# EAGLE board controlador_temperatura (EAGLE 9.6.2)
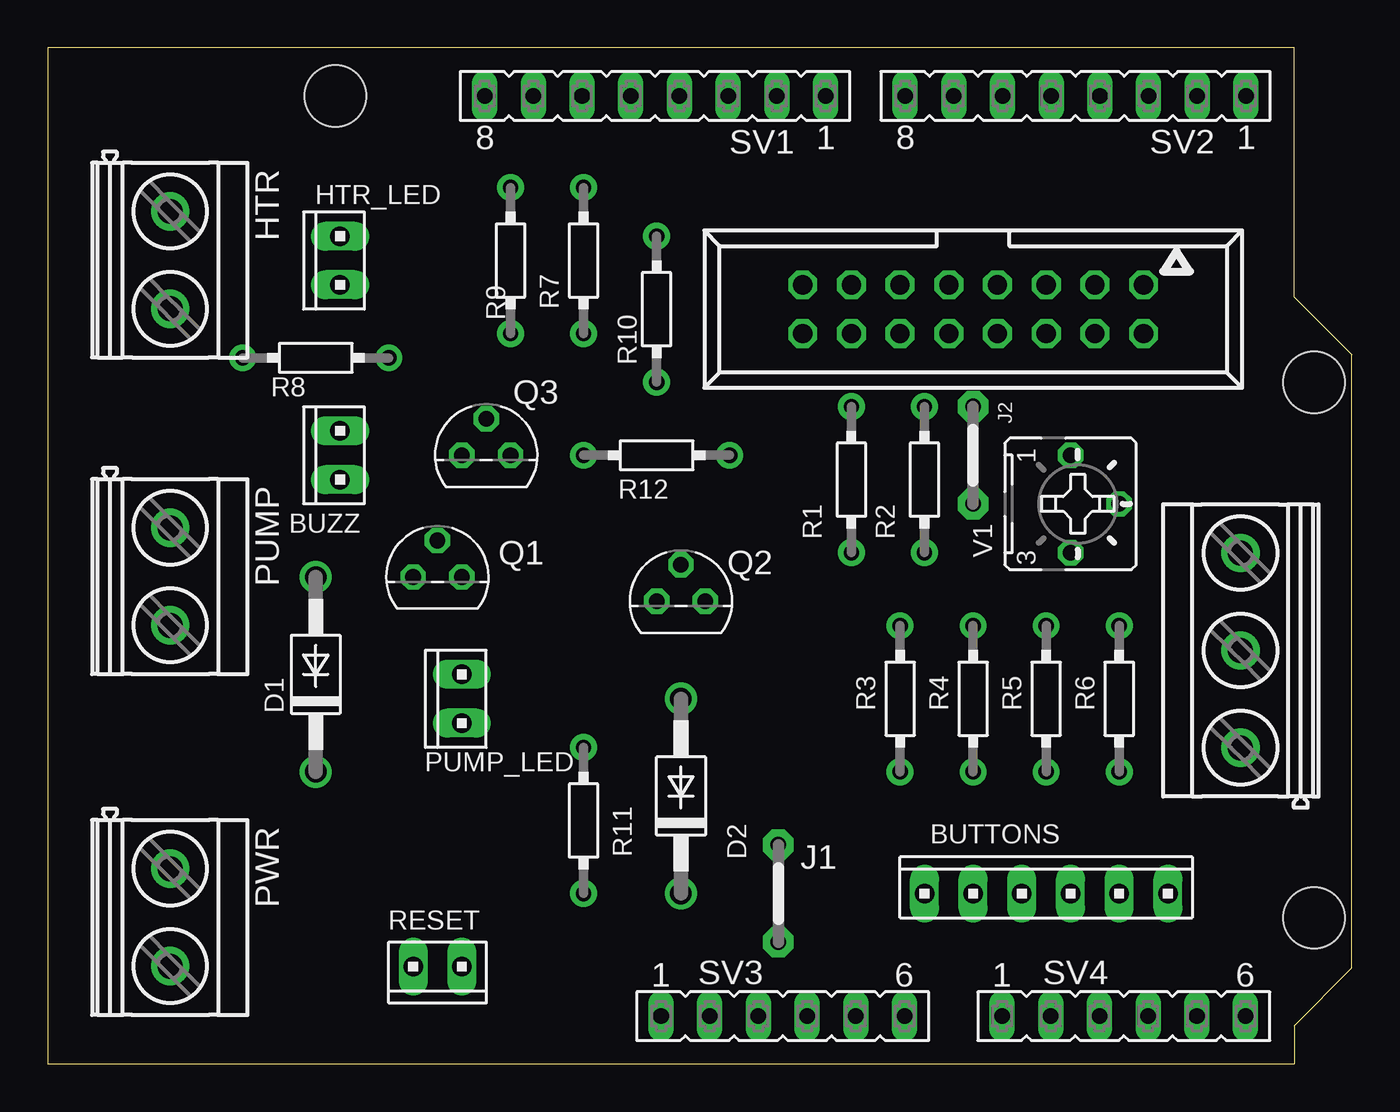
[diagram p0: board, top side]
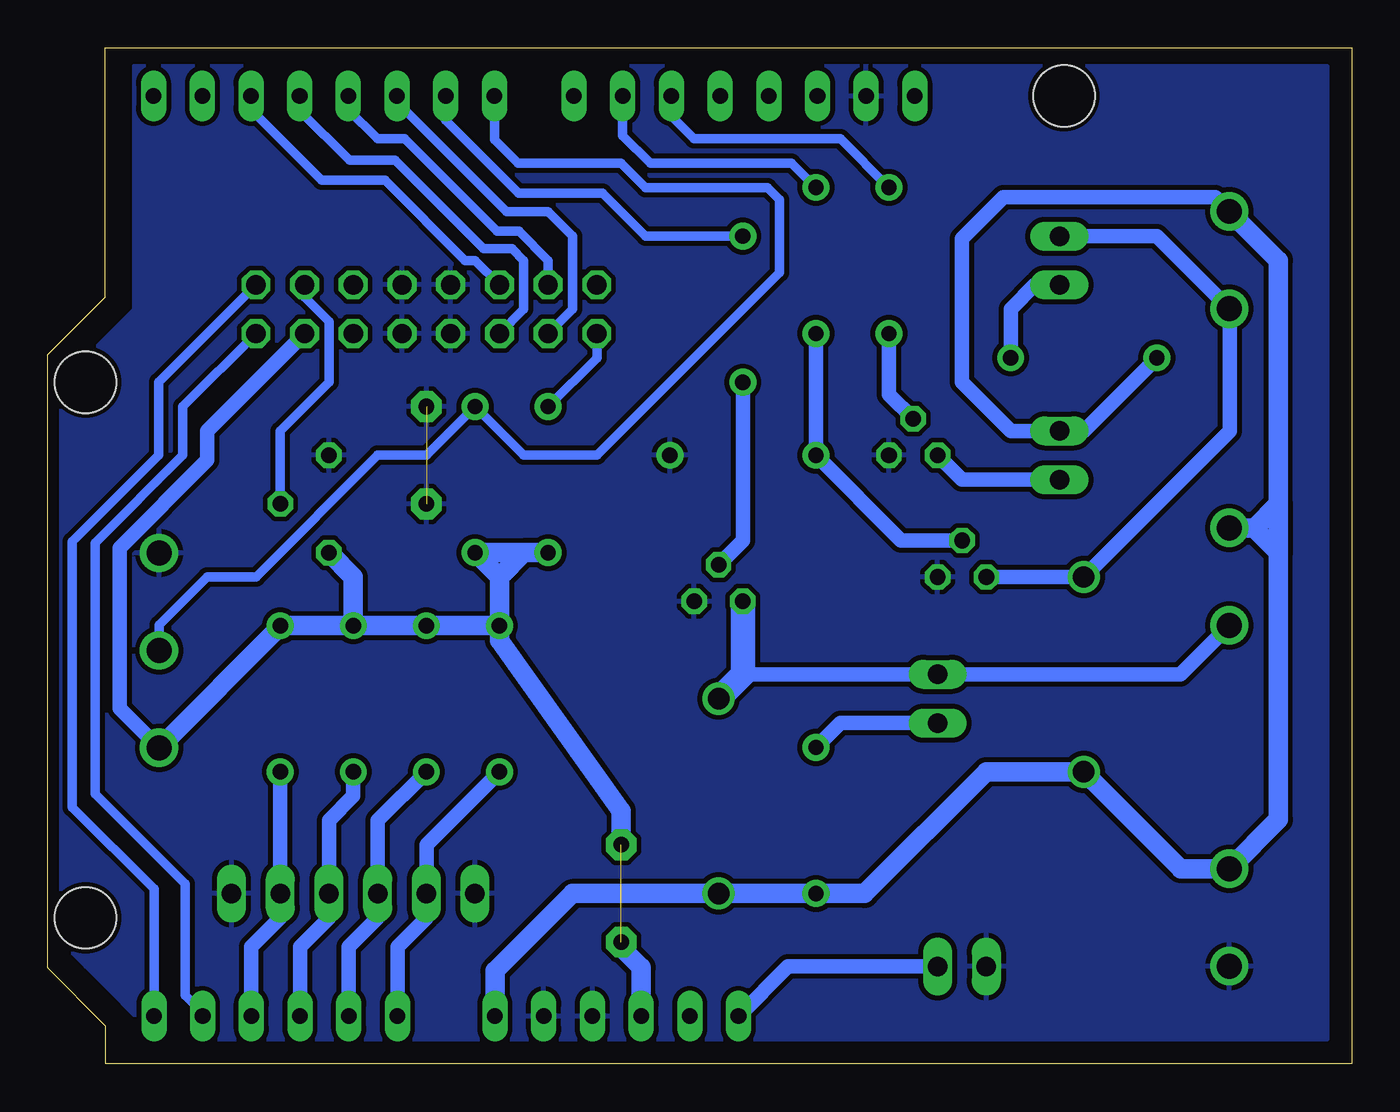
[diagram p1: board, bottom side, seen from below]

Size 68 x 53 mm. Coordinates in mm from the lower left corner, seen from the top.
Outline: 0,0 65,0 65,2 68,5 68,37 65,40 65,53 0,53 0,0
Copper layers (1*16): Top 0.035mm / dielectric 1.5mm / Bottom 0.035mm
Design rules "default *": minimum track width 6mil, minimum drill 0.35mm, track to track 10mil, track to pad 10mil, pad to pad 6mil, via to via 6mil, smd to smd 6mil, copper to edge 10mil, drill to drill 6mil, minimum pad ring 10mil, minimum via ring 8mil, stop-mask expansion 4mil, vias tented up to drill 0mil, thermal gap 10mil
Holes 3.2 mm at 15,50.5 66.04,35.56 66.04,7.62

## Footprints (pad centres in the part's own frame; a part is rotated, then mirrored left to right if it is on the bottom)
057-016-1 = drill 1 octagon: 1 -8.89,-1.27; 2 -8.89,1.27; 3 -6.35,-1.27; 4 -6.35,1.27; 5 -3.81,-1.27; 6 -3.81,1.27; 7 -1.27,-1.27; 8 -1.27,1.27; 9 1.27,-1.27; 10 1.27,1.27; 11 3.81,-1.27; 12 3.81,1.27; 13 6.35,-1.27; 14 6.35,1.27; 15 8.89,-1.27; 16 8.89,1.27
10X06MTA = drill 1.016 long: 1 6.35,0; 2 3.81,0; 3 1.27,0; 4 -1.27,0; 5 -3.81,0; 6 -6.35,0
10X02MTA = drill 1.016 long: 1 1.27,0; 2 -1.27,0
DO41-10 = drill 1.118: A 5.08,0; C -5.08,0
MKDSN1,5/3-5,08 = drill 1.3 pad 2: 1 -7.641,0.025; 2 -2.561,0.025; 3 2.519,0.025
MKDSN1,5/2-5,08 = drill 1.3 pad 2: 1 -2.561,0.025; 2 2.519,0.025
05 = drill 0.813 pad 1.6 octagon: 1 -2.54,0; 2 2.54,0
LCD-20X4-4HOLES = drill 1.016 square: P$1 10,57.5 | drill 1.016: P$2 12.54,57.5; P$3 15.08,57.5; P$4 17.62,57.5; P$5 20.16,57.5; P$6 22.7,57.5; P$7 25.24,57.5; P$8 27.78,57.5; P$9 30.32,57.5; P$10 32.86,57.5; P$11 35.4,57.5; P$12 37.94,57.5; P$13 40.48,57.5; P$14 43.02,57.5; P$15 45.56,57.5; P$16 48.1,57.5 | hole 3.2: 2.5,2.5; 2.5,57.5; 95.5,57.5; 95.5,2.5
TO92 = drill 0.813 octagon: 1 1.27,0; 2 0,1.905; 3 -1.27,0
RS1/8 = drill 0.8 pad 1.4: 1 -3.81,0; 2 3.81,0
FE08 = drill 0.813 long: 1 -8.89,0; 2 -6.35,0; 3 -3.81,0; 4 -1.27,0; 5 1.27,0; 6 3.81,0; 7 6.35,0; 8 8.89,0
FE06 = drill 0.813 long: 1 -6.35,0; 2 -3.81,0; 3 -1.27,0; 4 1.27,0; 5 3.81,0; 6 6.35,0
B25P = drill 0.813 octagon: A -2.54,0; E 2.54,0; S 0,2.54

## Placement (x,y rotation side)
A  LCD_A  [057-016-1]  48.26,39.37 180 top
BUTTONS  [10X06MTA]  52.07,8.89 0 top
BUZZ  [10X02MTA]  15.24,31.75 90 top
D1  1N4007  [DO41-10]  13.97,20.32 90 top
D2  1N4007  [DO41-10]  33.02,13.97 90 top
DS18B20  MKDSN1,5/3-5,08  [MKDSN1,5/3-5,08]  62.23,24.13 90 top
HTR  MKDSN1,5/2-5,08  [MKDSN1,5/2-5,08]  6.35,41.91 270 top
HTR_LED  [10X02MTA]  15.24,41.91 90 top
J1  J5MM  [05]  38.1,8.89 270 top
J2  J5MM  [05]  48.26,31.75 90 top
LCD  LCD-HD447804-HOLES20X4-4HOLES  [LCD-20X4-4HOLES]  -114.41,-4.48 0 top  (outside the outline)
PUMP  MKDSN1,5/2-5,08  [MKDSN1,5/2-5,08]  6.35,25.4 270 top
PUMP_LED  [10X02MTA]  21.59,19.05 90 top
PWR  MKDSN1,5/2-5,08  [MKDSN1,5/2-5,08]  6.35,7.62 270 top
Q1  BC337  [TO92]  20.32,25.4 0 top
Q2  BC337  [TO92]  33.02,24.13 0 top
Q3  BC337  [TO92]  22.86,31.75 0 top
R  LCD_B  [057-016-1]  -42.7,49.75 0 top  (outside the outline)
R1  220  [RS1/8]  41.91,30.48 270 top
R2  4.7k  [RS1/8]  45.72,30.48 270 top
R3  10k  [RS1/8]  44.45,19.05 90 top
R4  10k  [RS1/8]  48.26,19.05 90 top
R5  10k  [RS1/8]  52.07,19.05 90 top
R6  10k  [RS1/8]  55.88,19.05 90 top
R7  470  [RS1/8]  27.94,41.91 90 top
R8  470  [RS1/8]  13.97,36.83 180 top
R9  470  [RS1/8]  24.13,41.91 270 top
R10  470  [RS1/8]  31.75,39.37 270 top
R11  470  [RS1/8]  27.94,12.7 90 top
R12  10k  [RS1/8]  31.75,31.75 180 top
RESET  [10X02MTA]  20.32,5.08 180 top
SV1  [FE08]  31.67,50.49 180 top
SV2  [FE08]  53.6,50.5 180 top
SV3  [FE06]  38.33,2.49 0 top
SV4  [FE06]  56.12,2.49 0 top
V1  10K  [B25P]  53.34,29.21 270 top

## Library data of the parts
A R = con-panduit; OC_FARNELL: unknown; OC_NEWARK: unknown
BUTTONS BUZZ HTR_LED PUMP_LED RESET = con-amp
D1 D2 = diode
DS18B20 HTR PUMP PWR = con-phoenix-508
J1 J2 = jumper
LCD = HD44780LCD
Q1-Q3 = transistor-npn
R1-R12 = resistor-power; OC_FARNELL: unknown; OC_NEWARK: unknown
SV1-SV4 = con-lsta; OC_FARNELL: unknown; OC_NEWARK: unknown
V1 = pot

## Nets
+5V: A.4 DS18B20.1 J1.1 J1.2 R1.2 R2.2 R3.2 R4.2 R5.2 R6.2 SV3.3 V1.E
A0: BUTTONS.5 R3.1 SV4.1
A1: BUTTONS.4 R4.1 SV4.2
A2: BUTTONS.3 R5.1 SV4.3
A3: BUTTONS.2 R6.1 SV4.4
A4: A.2 SV4.5
A5: A.1 SV4.6
D2: A.11 SV2.3
D3: A.12 SV2.4
D4: A.13 SV2.5
D5: A.14 SV2.6
D6: R10.1 SV2.7
D7: DS18B20.2 R2.1 SV2.8
D9: R7.2 SV1.2
D10: R9.1 SV1.3
GND: A.7 A.8 A.9 A.10 BUTTONS.1 BUTTONS.6 DS18B20.3 J2.1 J2.2 PWR.2 Q1.1 Q2.1 Q3.1 R12.1 RESET.1 SV1.7 SV3.4 SV3.5 V1.A
HTR: D1.A HTR.2 HTR_LED.1 Q1.3
N$1: Q1.2 R7.1 R12.2
N$3: Q3.2 R9.2
N$4: HTR_LED.2 R8.1
N$5: Q2.2 R10.2
N$7: A.3 V1.S
N$8: PUMP_LED.2 R11.2
N$9: BUZZ.2 Q3.3
N$10: A.16 R1.1
N$11: LCD.P$6 R.1
N$12: LCD.P$1 LCD.P$5 LCD.P$7 LCD.P$8 LCD.P$9 LCD.P$10 LCD.P$16 R.7 R.8 R.9 R.10
N$13: LCD.P$3 R.3
N$14: LCD.P$15 R.16
N$15: LCD.P$2 R.4
N$16: LCD.P$4 R.2
N$20: LCD.P$11 R.11
N$21: LCD.P$12 R.12
N$22: LCD.P$13 R.13
N$23: LCD.P$14 R.14
PUMP: D2.A PUMP.2 PUMP_LED.1 Q2.3
RST: RESET.2 SV3.1
VIN: BUZZ.1 D1.C D2.C HTR.1 PUMP.1 PWR.1 R8.2 R11.1 SV3.6

## Tracks (layer width: path | path; a pad name or v marks a point on that pad's centre or on a via)
+5V  (1 unrouted)
  Bottom 0.762: DS18B20.1 64.26,18.55 64.26,26.92 59.69,31.5 59.69,33.02 A.4
  Bottom 1.016: DS18B20.1 55.88,22.81 R6.2 R5.2 | R5.2 R4.2 R3.2 | 44.45,25.4 R2.2 R1.2 43.18,26.67 44.45,25.4 | 44.45,25.4 R3.2 | R5.2 52.07,25.4 V1.E | R3.2 44.45,22.1 38.1,13.21 J1.1 | SV3.3 37.06,5.03 38.1,6.07 J1.2
A0
  Bottom 0.762: SV4.1 49.77,6.11 48.26,7.62 BUTTONS.5 48.26,11.43 R3.1
A1
  Bottom 0.762: SV4.2 52.31,6.11 50.8,7.62 BUTTONS.4 50.8,12.7 R4.1
A2
  Bottom 0.762: SV4.3 54.85,6.11 53.34,7.62 BUTTONS.3 53.34,12.7 52.07,13.97 R5.1
A3
  Bottom 0.762: SV4.4 57.39,6.11 55.88,7.62 BUTTONS.2 R6.1
A4
  Bottom 0.508: 59.69,2.54 59.74,2.49 | 59.74,2.49 SV4.5 | 59.74,2.49 60.83,3.58 60.83,9.4 65.53,14.1 65.53,27.18 60.96,31.75 60.96,34.29 A.2
A5
  Bottom 0.508: SV4.6 62.47,9.13 66.73,13.39 66.73,27.25 62.23,31.75 62.23,35.56 A.1
D2
  Bottom 0.508: SV2.3 57.41,49.79 53.72,46.1 50.42,46.1 46.23,41.91 45.72,41.91 A.11
D3
  Bottom 0.508: A.12 43.18,39.37 43.18,41.91 43.79,42.52 45.27,42.52 49.89,47.14 52.27,47.14 54.87,49.74 SV2.4
D4
  Bottom 0.508: A.13 41.91,41.91 43.43,43.43 44.58,43.43 49.4,48.26 50.8,48.26 52.33,49.79 SV2.5
D5
  Bottom 0.508: A.14 40.64,39.37 40.64,43.18 41.91,44.45 44.07,44.45 49.79,50.17 SV2.6
D6
  Bottom 0.508: R10.1 36.83,43.18 39.07,45.42 43.44,45.42 47.25,49.23 SV2.7
D7
  Bottom 0.508: SV2.8 44.71,48.21 43.49,46.99 38.1,46.99 36.83,45.72 30.48,45.72 29.84,45.09 29.84,41.27 39.37,31.75 43.18,31.75 R2.1 48.26,31.75 50.8,31.75 57.15,25.4 59.69,25.4 62.2,22.89 DS18B20.2
D9
  Bottom 0.508: R7.2 29.21,46.99 36.58,46.99 38.02,48.43 SV1.2
D10
  Bottom 0.508: R9.1 26.67,48.26 34.29,48.26 35.48,49.45 SV1.3
GND  (1 unrouted)
  Bottom 1.016: 19.03,5.1 RESET.1
  pour Bottom: 1.27,52.07 1.27,1.27 62.23,1.27 66.04,5.08 67.31,6.35 67.31,35.56 63.5,39.37 63.5,40.64 63.5,52.07
HTR
  Bottom 0.762: HTR_LED.1 10.16,43.18 HTR.2 6.35,39.37 6.35,33.02 D1.A Q1.3
N$1
  Bottom 0.762: R7.1 R12.2 23.5,27.3 Q1.2
N$3
  Bottom 0.762: R9.2 24.13,34.92 Q3.2
N$4
  Bottom 0.762: R8.1 17.78,39.37 16.51,40.64 HTR_LED.2
N$5
  Bottom 0.762: R10.2 31.75,27.3 Q2.2
N$7
  Bottom 0.508: V1.S 55.88,33.02 53.34,35.56 53.34,38.73 54.61,40.01 A.3
N$8
  Bottom 0.762: R11.2 26.67,17.78 PUMP_LED.2
N$9
  Bottom 0.762: Q3.3 20.32,30.48 BUZZ.2
N$10
  Bottom 0.508: R1.1 39.37,36.83 A.16
N$11  (1 unrouted)
N$12  (10 unrouted)
N$13  (1 unrouted)
N$14  (1 unrouted)
N$15  (1 unrouted)
N$16  (1 unrouted)
N$20  (1 unrouted)
N$21  (1 unrouted)
N$22  (1 unrouted)
N$23  (1 unrouted)
PUMP
  Bottom 0.762: PUMP_LED.1 8.94,20.32 PUMP.2 | PUMP_LED.1 31.75,20.32 | 27.94,20.32 PUMP_LED.1
  Bottom 1.27: Q2.3 31.75,20.32 D2.A
RST
  Bottom 0.762: RESET.2 29.39,5.08 SV3.1
VIN
  Bottom 0.762: R8.2 13.97,33.02 BUZZ.1 17.78,33.02 20.32,35.56 20.32,43.05 18.16,45.21 7.12,45.21 HTR.1
  Bottom 1.016: 3.81,26.67 3.81,12.75 PWR.1 8.91,10.18 D1.C 19.05,15.24 25.4,8.89 R11.1 D2.C 40.64,8.89 44.68,4.85 SV3.6 | 3.81,29.21 3.81,41.91 HTR.1 | 3.81,26.67 5.11,27.96 PUMP.1 5.06,27.96 3.81,29.21 | 3.81,29.21 3.81,26.67